# EAGLE board led_brick_smd (EAGLE 7.2.0)
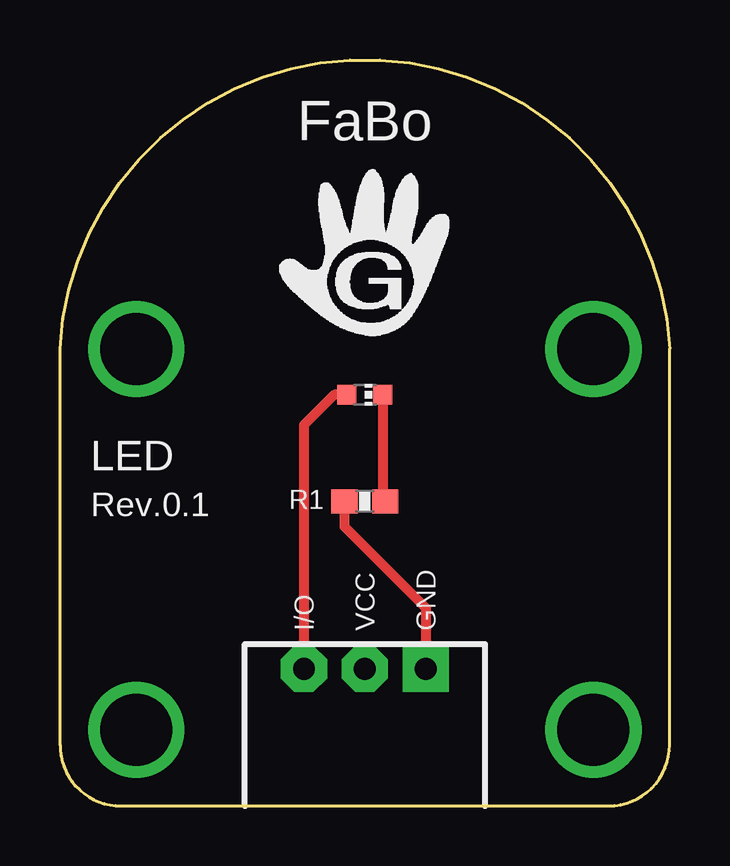
[diagram p0: board, top side]
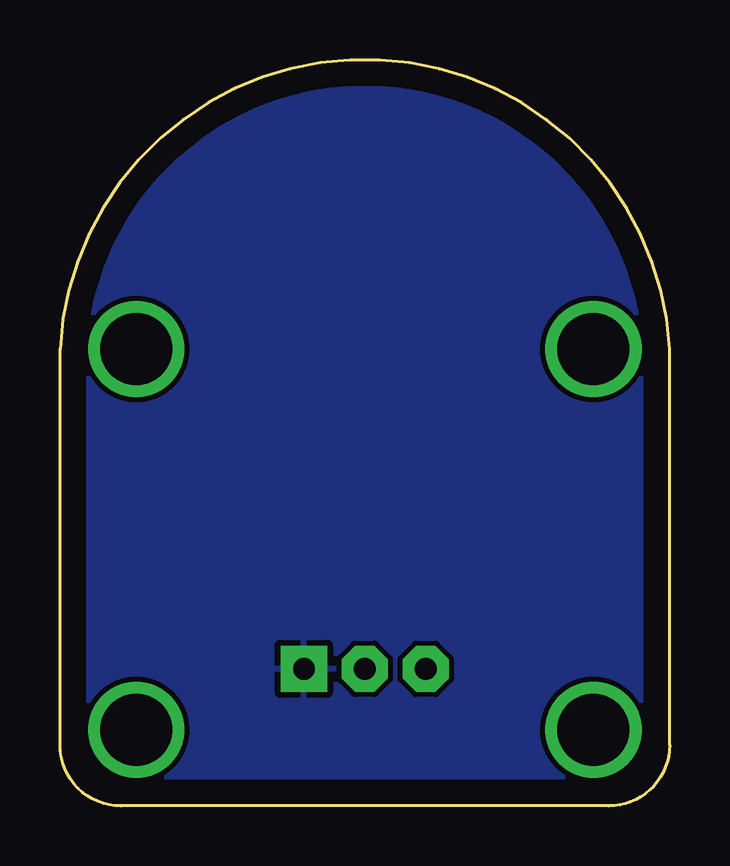
[diagram p1: board, bottom side, seen from below]

Size 25.4 x 31.1 mm. Coordinates in mm from the lower left corner, seen from the top.
Copper layers (1*16): Top 0.035mm / dielectric 1.5mm / Bottom 0.035mm
Design rules "default": minimum track width 10mil, minimum drill 24mil, track to track 8mil, track to pad 8mil, pad to pad 8mil, via to via 8mil, smd to smd 8mil, copper to edge 40mil, drill to drill 8mil, minimum pad ring 10mil, minimum via ring 8mil, stop-mask expansion 4mil, vias tented up to drill 0mil, thermal gap 10mil

## Footprints (pad centres in the part's own frame; a part is rotated, then mirrored left to right if it is on the bottom)
BRICK_3PIN = drill 0.9 pad 1.93 square: GND 2.54,-9.525 | drill 0.9 pad 1.93 octagon: IN/OUT -2.54,-9.525; VCC 0,-9.525 | drill 3 pad 3.81: P$1 -9.525,3.81; P$2 9.525,3.81; P$3 9.525,-12.065; P$4 -9.525,-12.065
CHIP-LED0603 = smd 0.8 x 0.8: A 0,-0.75; C 0,0.75
0603-RES = smd 1.1 x 1: 1 -0.85,0; 2 0.85,0

## Placement (x,y rotation side)
J1  BRICK_3PIN  [BRICK_3PIN]  12.7,15.24 0 top
LED  LED  [CHIP-LED0603]  12.7,17.15 270 top
R1  1k  [0603-RES]  12.7,12.7 0 top

## Library data of the parts
J1 = Gclue
LED = adafruit
R1 = SparkFun

## Nets
GND: J1.GND R1.1
N$1: J1.IN/OUT LED.A
N$3: LED.C R1.2

## Tracks (layer width: path | path; a pad name or v marks a point on that pad's centre or on a via)
GND
  Top 0.406: R1.1 11.85,11.64 15.24,8.26 J1.GND
  pour Bottom: -0.64,-0.63 26.04,-0.63 26.04,31.75 -0.64,31.75
N$1
  Top 0.406: LED.A 11.43,17.15 10.16,15.88 J1.IN/OUT
N$3
  Top 0.406: LED.C 13.45,12.8 R1.2

## Text on the board
tPlace: LED | Rev.0.1